# Allegro board 8051demoboard.brd
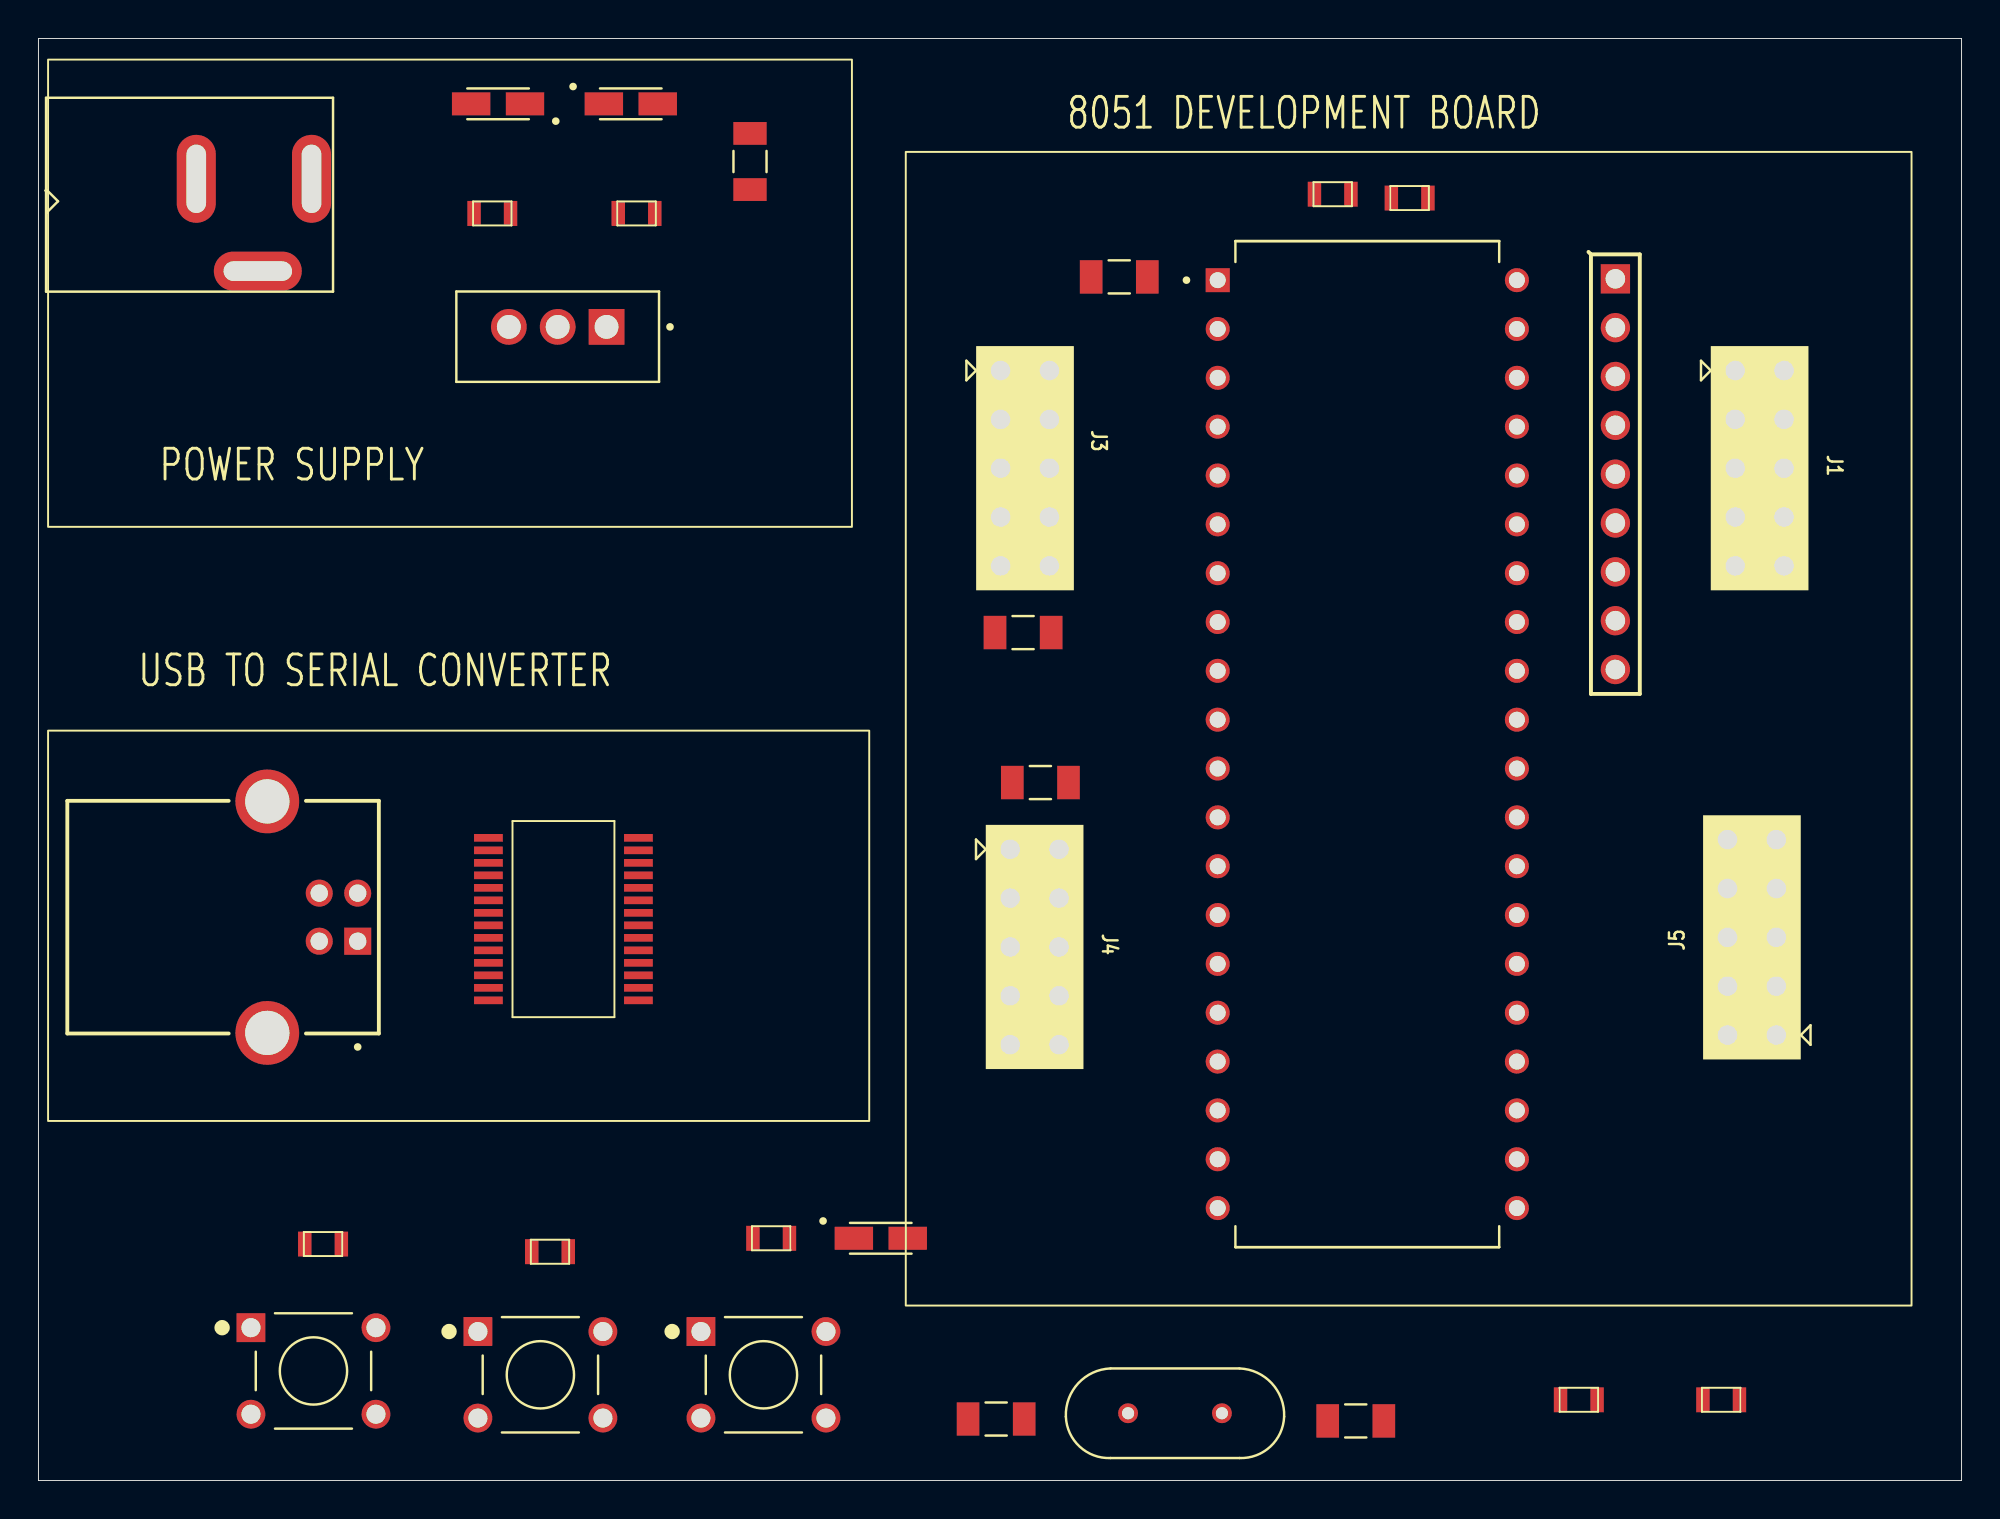
[diagram p0: board, top side]
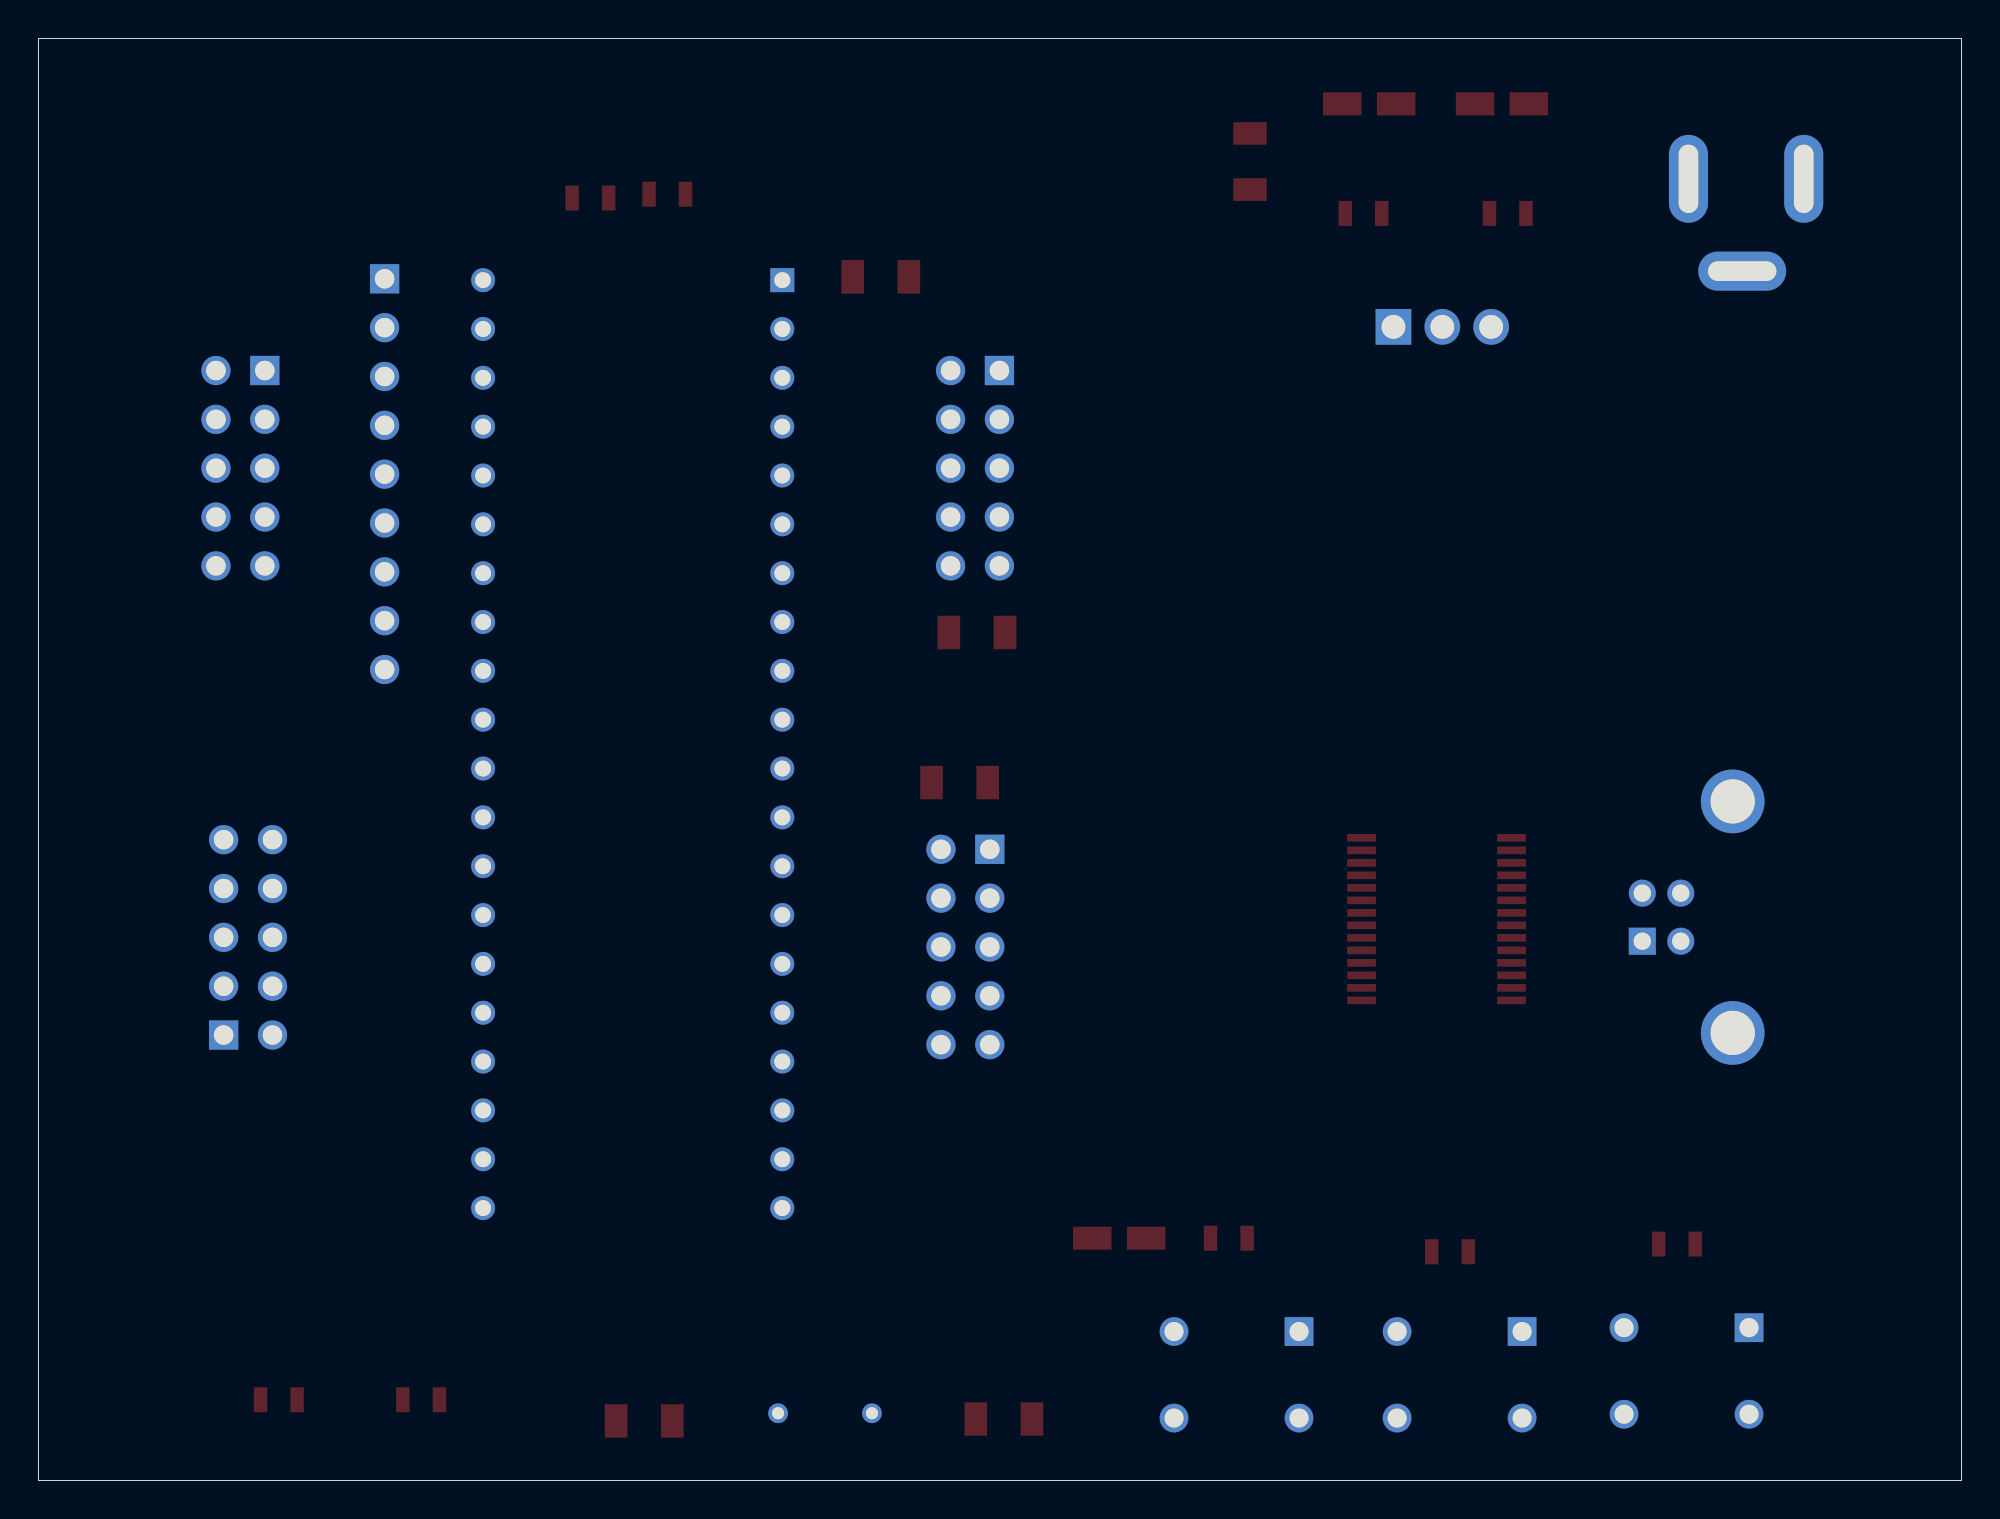
[diagram p1: board, bottom side, seen from below]

Outline 100 x 75 mm; copper layers: TOP, BOTTOM. Coordinates in mm from the lower left corner of the outline.
Outline path: 0,75 0,0 100,0 100,75 0,75

## Design rules (mm)
constraint set DEFAULT: min track width 0.127

## Placement (name value [footprint] x y rotation side)
C1  0.1uF  [CAPC3115X163N]  56.2 62.6 0 top
C2  10uF  [CAPMP3216X166]  43.8 12.6 0 top
C3  33PF  [CAPC3115X163N]  49.8 3.2 180 top
C4  33PF  [CAPC3115X163N]  68.5 3.1 0 top
C5  0.1uF  [CAPC3115X163N]  51.2 44.1 0 top
C6  0.1uF  [CAPC3115X163N]  52.1 36.3 0 top
C7  470uF/25V  [CAPMP3216X166]  30.8 71.6 0 top
C8  100uf/16v  [CAPMP3216X166]  23.9 71.6 180 top
C9  0.1uF  [CAPC3115X163N]  37 68.6 90 top
D1  -  [LED]  87.5 4.2 0 top
D2  -  [LED]  31.1 65.9 0 top
J1  PORTO  [HDR]  89.5 46.3 270 top
J2  PJ-002A  [POWER_JACK_3P]  14.2 67.7 180 top
J3  PORT1  [HDR]  51.3 46.3 270 top
J4  PORT3  [HDR]  51.8 21.4 270 top
J5  PORT2  [HDR]  89.1 34.6 90 top
R1  SIP_9_10K  [RES_SIP]  82 62.5 270 top
R2  8K2  [RES]  14.8 12.3 0 top
R3  8K2  [RES]  26.6 11.9 0 top
R4  8K2  [RES]  38.1 12.6 180 top
R5  8K2  [RES]  71.3 66.7 180 top
R6  8K2  [RES]  67.3 66.9 0 top
R7  330E  [RES]  80.1 4.2 0 top
R8  330E  [RES]  23.6 65.9 0 top
SW1  RESET  [SW_FSM8JH]  14.3 5.7 0 top
SW2  RESET  [SW_FSM8JH]  37.7 5.5 0 top
SW3  RESET  [SW_FSM8JH]  26.1 5.5 0 top
U1  8051  [ATMEL8051]  69.1 38.3 0 top
U2  USB B TYPE  [SAMTEC_USB-B-S-X-X-TH]  11.9 29.3 270 top
U3  FT232RL  [FT232]  27.3 29.2 0 top
U4  7805  [TO254P1054X470X1955-3]  27 60 180 top
Y1  11.092MHz  [XTAL_ECS-1105-32-1]  59.1 3.5 0 top

## Library data of the parts
C1 C3-C6 C9 = CAP NP
C2 C7 C8 = CAP
D1 D2 = LED
J1 J3-J5 = HEADER 5X2
J2 = PJ-002A
R1 = RESISTOR SIP 9
R2-R8 = R
SW1-SW3 = SW PUSHBUTTON-SPST-2
U1 = 8051_3
U2 = usb mini_0
U3 = FT232_0
U4 = 78XX/SM_1
Y1 = CRYSTAL

## Footprints (pads in the part's own frame, mm; a bottom-side part is the same pattern mirrored in y, then rotated)
ATMEL8051
  rect 1.25x1.25 hole 0.83: 1(-7.779,24.13)
  round 1.25 hole 0.83: 2(-7.779,21.59) 3(-7.779,19.05) 4(-7.779,16.51) 5(-7.779,13.97) 6(-7.779,11.43) 7(-7.779,8.89) 8(-7.779,6.35) 9(-7.779,3.81) 10(-7.779,1.27) 11(-7.779,-1.27) 12(-7.779,-3.81) 13(-7.779,-6.35) 14(-7.779,-8.89) 15(-7.779,-11.43) 16(-7.779,-13.97) 17(-7.779,-16.51) 18(-7.779,-19.05) 19(-7.779,-21.59) 20(-7.779,-24.13) 21(7.779,-24.13) 22(7.779,-21.59) 23(7.779,-19.05) 24(7.779,-16.51) 25(7.779,-13.97) 26(7.779,-11.43) 27(7.779,-8.89) 28(7.779,-6.35) 29(7.779,-3.81) 30(7.779,-1.27) 31(7.779,1.27) 32(7.779,3.81) 33(7.779,6.35) 34(7.779,8.89) 35(7.779,11.43) 36(7.779,13.97) 37(7.779,16.51) 38(7.779,19.05) 39(7.779,21.59) 40(7.779,24.13)
CAPC3115X163N
  rect 1.18x1.74 smd: 1(-1.46,0) 2(1.46,0)
CAPMP3216X166
  rect 2x1.2 smd: 1(1.4,0) 2(-1.4,0)
FT232
  rect 1.5x0.4 smd: 1(-3.9,4.225) 2(-3.9,3.575) 3(-3.9,2.925) 4(-3.9,2.275) 5(-3.9,1.625) 6(-3.9,0.975) 7(-3.9,0.325) 8(-3.9,-0.325) 9(-3.9,-0.975) 10(-3.9,-1.625) 11(-3.9,-2.275) 12(-3.9,-2.925) 13(-3.9,-3.575) 14(-3.9,-4.225) 15(3.9,-4.225) 16(3.9,-3.575) 17(3.9,-2.925) 18(3.9,-2.275) 19(3.9,-1.625) 20(3.9,-0.975) 21(3.9,-0.325) 22(3.9,0.325) 23(3.9,0.975) 24(3.9,1.625) 25(3.9,2.275) 26(3.9,2.925) 27(3.9,3.575) 28(3.9,4.225)
HDR
  rect 1.524x1.524 hole 1.016: 1(-11.43,-1.27)
  round 1.524 hole 1.016: 2(-11.43,1.27) 3(-8.89,-1.27) 4(-8.89,1.27) 5(-6.35,-1.27) 6(-6.35,1.27) 7(-3.81,-1.27) 8(-3.81,1.27) 9(-1.27,-1.27) 10(-1.27,1.27)
LED
  rect 0.7x1.3 smd: 1(-0.95,0) 2(0.95,0)
POWER_JACK_3P
  oval 2.032x4.572 hole 1.016x3.556: 1(0,0) 2(5.994,0)
  oval 4.572x2.032 hole 3.556x1.016: 3(2.794,4.801)
RES
  rect 0.7x1.3 smd: 1(-0.95,0) 2(0.95,0)
RES_SIP
  rect 1.524x1.524 hole 1.016: 1(0,0)
  round 1.524 hole 1.016: 2(2.54,0) 3(5.08,0) 4(7.62,0) 5(10.16,0) 6(12.7,0) 7(15.24,0) 8(17.78,0) 9(20.32,0)
SAMTEC_USB-B-S-X-X-TH
  rect 1.408x1.408 hole 0.9: 1(1.25,4.7)
  round 1.408 hole 0.9: 2(-1.25,4.7) 3(-1.25,2.7) 4(1.25,2.7)
  round 3.316 hole 2.3: S1(-6.02,0) S2(6.02,0)
SW_FSM8JH
  rect 1.498x1.498 hole 0.99: 1(-3.25,2.25)
  round 1.498 hole 0.99: 2(-3.25,-2.25) 3(3.25,2.25) 4(3.25,-2.25)
TO254P1054X470X1955-3
  rect 1.86x1.86 hole 1.24: 1(-2.54,0)
  round 1.86 hole 1.24: 2(0,0) 3(2.54,0)
XTAL_ECS-1105-32-1
  round 1.03 hole 0.63: 1(-2.44,0) 2(2.44,0)

## Nets
GND: C1.2 C3.2 C4.2 C5.2 C6.2 C7.2 C8.2 C9.2 D1.1(CATHODE) D2.1(CATHODE) J1.10 J2.2 J2.3 J3.10 J4.10 J5.10 R4.2 SW3.2 U1.20 U2.4 U3.7 U3.18 U3.21 U3.25 U3.26 U4.2
VCC_5V: C1.1 C2.1 C5.1 C8.1 C9.1 J1.9 J3.9 J4.9 J5.9 R1.1 R2.1 R3.1 R5.1 R6.1 R8.1 SW2.3 U1.40 U2.1(VCC) U3.20 U4.3(VOUT)
EA: R5.2 U1.31
P0_0: J1.1 R1.2 U1.39
P0_1: J1.2 R1.3 U1.38
P0_2: J1.3 R1.4 U1.37
P0_3: J1.4 R1.5 U1.36
P0_4: J1.5 R1.6 U1.35
P0_5: J1.6 R1.7 U1.34
P0_6: J1.7 R1.8 U1.33
P0_7: J1.8 R1.9 U1.32
P1_0: J3.1 U1.1
P1_1: J3.2 U1.2
P1_2: J3.3 U1.3
P1_3: J3.4 U1.4
P1_4: J3.5 U1.5
P1_5: J3.6 U1.6
P1_6: J3.7 U1.7
P1_7: J3.8 U1.8
P2_0: J5.1 U1.21
P2_1: J5.2 U1.22
P2_2: J5.3 U1.23
P2_3: J5.4 U1.24
P2_4: J5.5 U1.25
P2_5: J5.6 U1.26
P2_6: J5.7 U1.27
P2_7: J5.8 U1.28
P3_0: J4.1 U1.10 U3.5
P3_1: J4.2 R7.1 U1.11 U3.1
P3_2: J4.3 R2.2 SW1.3 U1.12
P3_3: J4.4 R3.2 SW3.3 U1.13
P3_4: J4.5 U1.14
P3_5: J4.6 U1.15
P3_6: J4.7 U1.16
P3_7: J4.8 U1.17
PSEN: R6.2 U1.29
N01726: C7.1 J2.1 U4.1
N02103: D2.2 R8.2
N04217: C2.2 R4.1 SW2.2 U1.9
N04859: C3.1 U1.19 Y1.1
N04866: C4.1 U1.18(XTAL2) Y1.2
N12607: C6.1 U3.4(VCCIO)
N12808: U2.2 U3.16
N12820: U2.3 U3.15
N15631: SW1.2 SW3.1
N16405: D1.2 R7.2

Pads without a net: SW1 1 4; SW2 1 4; SW3 4; U1 30; U2 S1 S2; U3 2 3 6 8 9 10 11 12 13 14 17 19 22 23 24 27 28

## Text on the board
Ref Des/Silkscreen Top: USB TO SERIAL CONVERTER | POWER SUPPLY | 8051 DEVELOPMENT BOARD
